# Altium PCB pcb.PcbDoc
Units mm, origin at the board's own origin, x right, y up, seen from the top; angles counter-clockwise.
Board outline 38.1 x 46.35 mm, 2 copper layers (Top Layer, Bottom Layer); 101 components, 100 nets, 200 pads, 0 vias.
Unrouted connection lines stored in the file: 62.
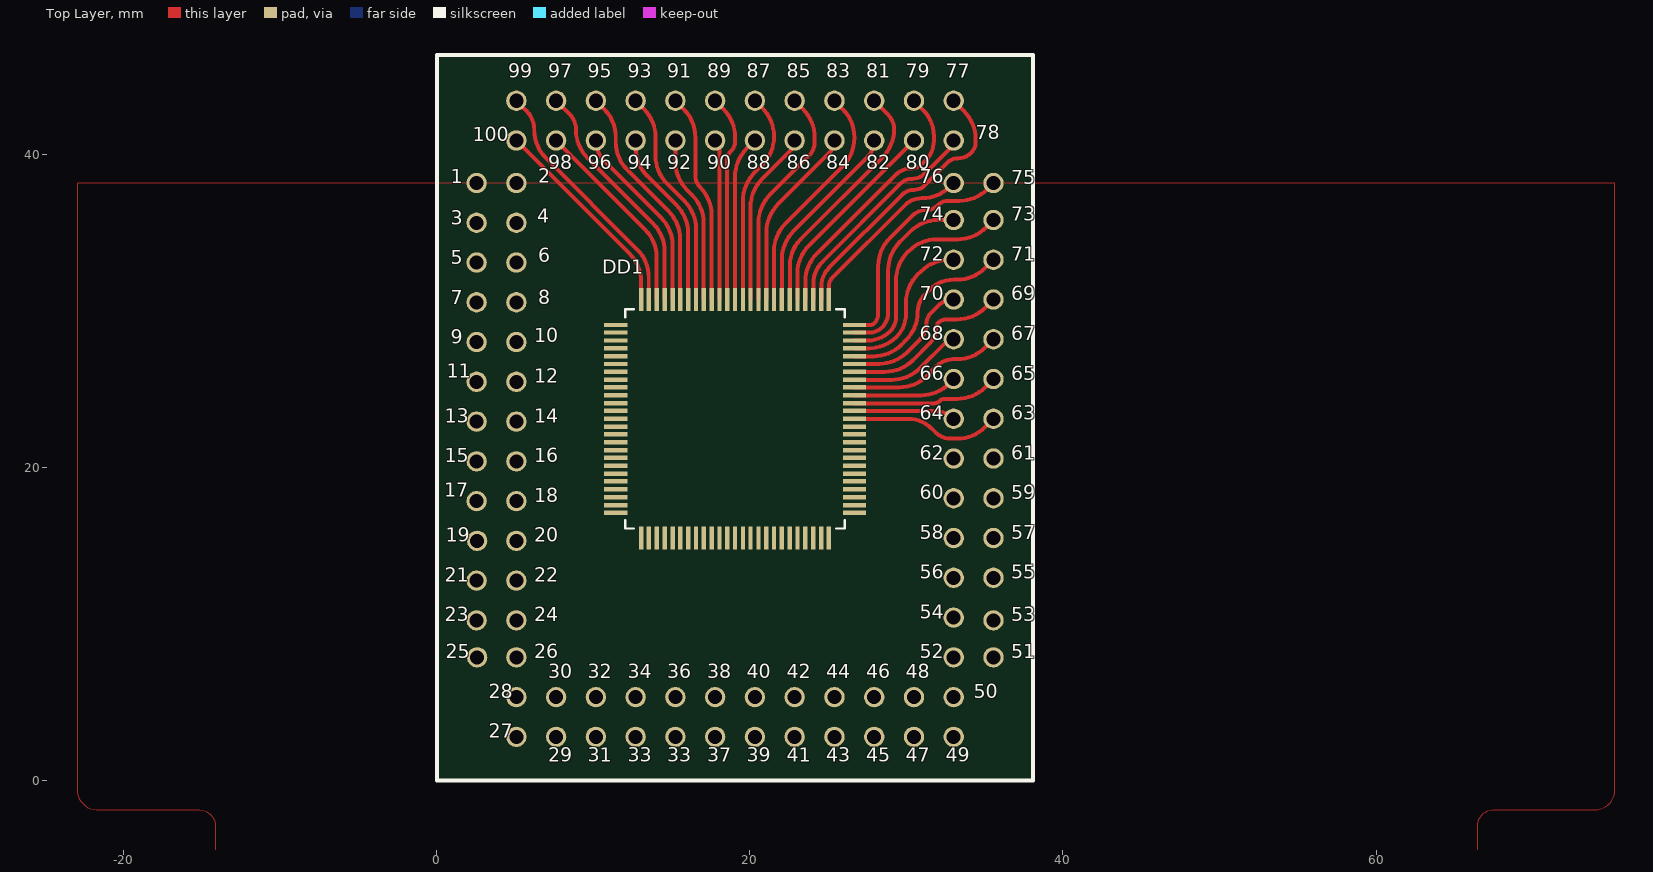
[diagram p0: Top Layer view]
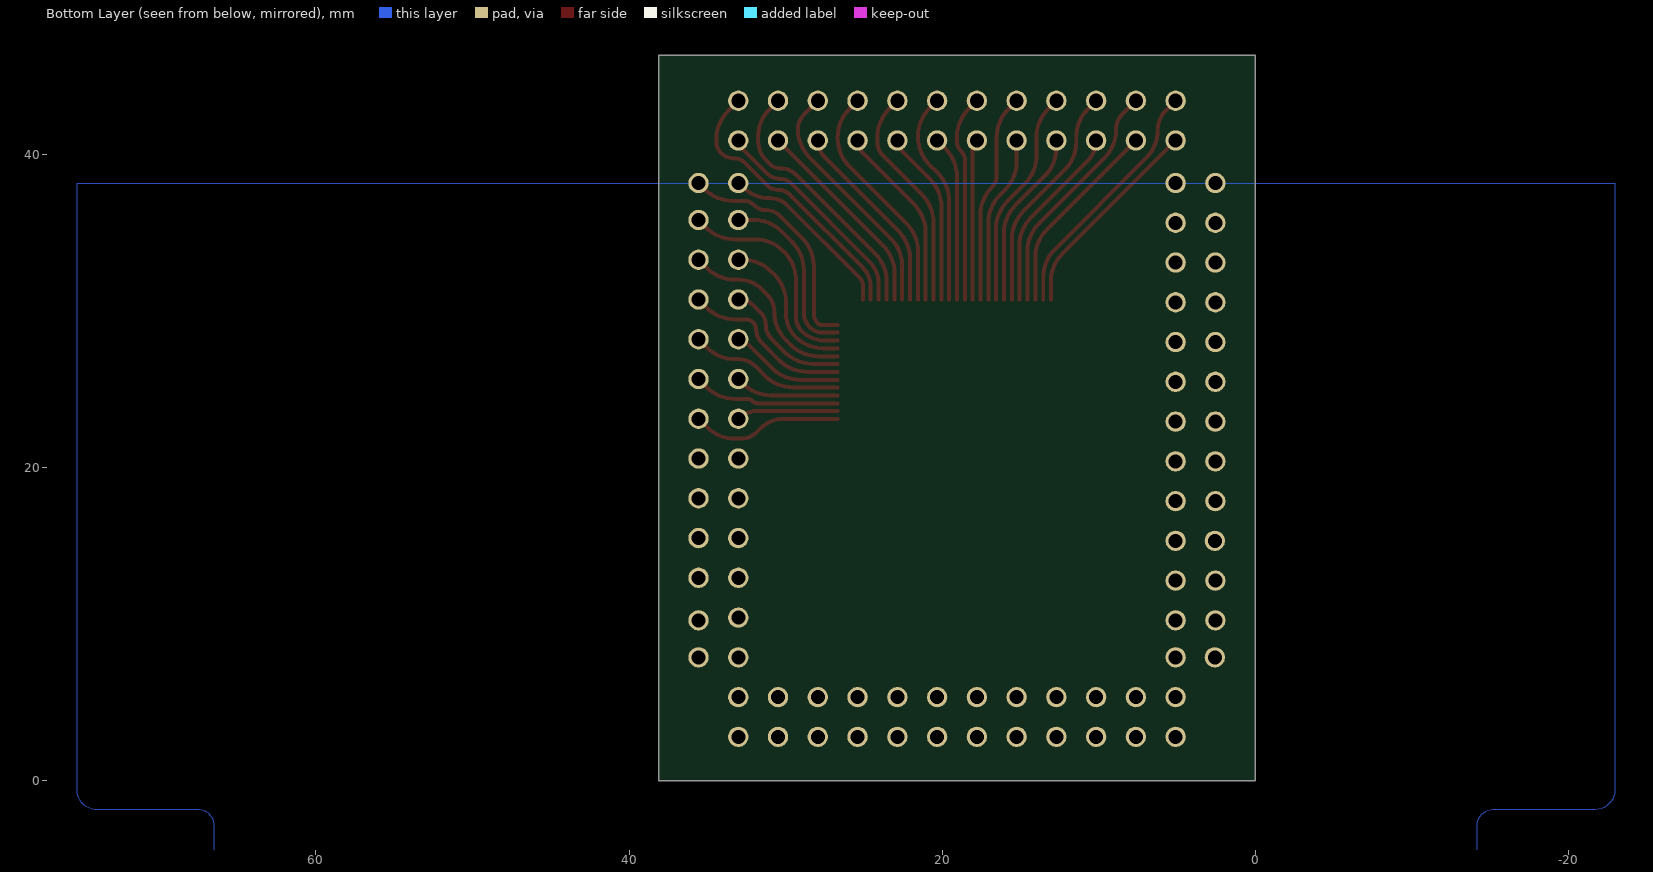
[diagram p1: Bottom Layer view, seen from below]

## Layer stack, top to bottom
Top Solder: solder mask 0.0102, Solder Resist, Dk 3.5
Top Layer: signal copper 0.0356
Dielectric 1: dielectric 0.32, FR-4, Dk 4.8
Bottom Layer: signal copper 0.0356
Bottom Solder: solder mask 0.0102, Solder Resist, Dk 3.5

## Board outline
0,0 38.1,0 38.1,46.355 0,46.355

## Design rules (kind name [scope] priority, off if disabled: settings)
Clearance [All] p1: gap=0.254 ignorepadtopadclearanceinfootprint=FALSE except(0: Arc-Hole Track-Hole SMDPad-Hole THPad-Hole Via-Hole Fill-Hole Poly-Hole Region-Hole Text-Hole; 0.2: Arc-Arc Arc-Track Arc-SMDPad Track-Track Track-SMDPad SMDPad-SMDPad THPad-THPad)
PolygonConnect [All] p1: connectstyle=Relief reliefconductorwidth=0.254 reliefentries=4 polygonreliefangle="90 Angle" airgapwidth=0.254
RoomDefinition main [InComponentClass('main')] p1: confinementstyle=ConfineIn formatcopy=TRUE lockcomponents=FALSE outline -1.651,-1.27 39.497,-1.27 39.497,47.879 -1.651,47.879
RoutingVias [All] p1: holewidth=0.2 width=0.4 viastyle="Through Hole" minholewidth=0.2 minwidth=0.4 maxholewidth=0.2 maxwidth=0.4
SolderMaskExpansion [All] p1: expansion=0.102
Width [All] p1: maxlimit=0.6 minlimit=0.2 preferedwidth=0.254 minimp=50.000000 maximp=50.000000 favimp=50.000000
30 further rules are at their usual default settings.

## Components (designator, comment, footprint, x,y, rotation, side; value= is the part's Value field where it differs from the comment)
1 "onepin" onepin 2.54,38.176 r0 top
2 "onepin" onepin 5.08,38.176 r0 top
3 "onepin" onepin 2.54,35.636 r0 top
4 "onepin" onepin 5.08,35.636 r0 top
5 "onepin" onepin 2.54,33.096 r0 top
6 "onepin" onepin 5.08,33.096 r0 top
7 "onepin" onepin 2.54,30.556 r0 top
8 "onepin" onepin 5.08,30.556 r0 top
9 "onepin" onepin 2.54,28.016 r0 top
10 "onepin" onepin 5.08,28.016 r0 top
11 "onepin" onepin 2.54,25.476 r0 top
12 "onepin" onepin 5.08,25.476 r0 top
13 "onepin" onepin 2.54,22.936 r0 top
14 "onepin" onepin 5.08,22.936 r0 top
15 "onepin" onepin 2.54,20.396 r0 top
16 "onepin" onepin 5.08,20.396 r0 top
17 "onepin" onepin 2.54,17.856 r0 top
18 "onepin" onepin 5.08,17.856 r0 top
19 "onepin" onepin 2.575,15.316 r0 top
20 "onepin" onepin 5.08,15.316 r0 top
21 "onepin" onepin 2.54,12.776 r0 top
22 "onepin" onepin 5.08,12.776 r0 top
23 "onepin" onepin 2.54,10.236 r0 top
24 "onepin" onepin 5.08,10.236 r0 top
25 "onepin" onepin 2.575,7.874 r0 top
26 "onepin" onepin 5.08,7.874 r0 top
27 "onepin" onepin 5.08,2.794 r0 top
28 "onepin" onepin 5.08,5.334 r0 top
29 "onepin" onepin 7.62,2.794 r0 top
30 "onepin" onepin 7.62,5.334 r0 top
31 "onepin" onepin 10.16,2.794 r0 top
32 "onepin" onepin 10.16,5.334 r0 top
33 "onepin" onepin 12.7,2.794 r0 top
33 "onepin" onepin 15.24,2.794 r0 top
34 "onepin" onepin 12.7,5.334 r0 top
36 "onepin" onepin 15.24,5.334 r0 top
37 "onepin" onepin 17.78,2.794 r0 top
38 "onepin" onepin 17.78,5.334 r0 top
39 "onepin" onepin 20.32,2.794 r0 top
40 "onepin" onepin 20.32,5.334 r0 top
41 "onepin" onepin 22.86,2.794 r0 top
42 "onepin" onepin 22.86,5.334 r0 top
43 "onepin" onepin 25.4,2.794 r0 top
44 "onepin" onepin 25.4,5.334 r0 top
45 "onepin" onepin 27.94,2.794 r0 top
46 "onepin" onepin 27.94,5.334 r0 top
47 "onepin" onepin 30.48,2.794 r0 top
48 "onepin" onepin 30.48,5.334 r0 top
49 "onepin" onepin 33.02,2.794 r0 top
50 "onepin" onepin 33.02,5.334 r0 top
51 "onepin" onepin 35.56,7.874 r0 top
52 "onepin" onepin 33.02,7.874 r0 top
53 "onepin" onepin 35.56,10.236 r0 top
54 "onepin" onepin 33.02,10.414 r0 top
55 "onepin" onepin 35.56,12.954 r0 top
56 "onepin" onepin 33.02,12.954 r0 top
57 "onepin" onepin 35.56,15.494 r0 top
58 "onepin" onepin 33.02,15.494 r0 top
59 "onepin" onepin 35.56,18.034 r0 top
60 "onepin" onepin 33.02,18.034 r0 top
61 "onepin" onepin 35.56,20.574 r0 top
62 "onepin" onepin 33.02,20.574 r0 top
63 "onepin" onepin 35.56,23.114 r0 top
64 "onepin" onepin 33.02,23.114 r0 top
65 "onepin" onepin 35.56,25.654 r0 top
66 "onepin" onepin 33.02,25.654 r0 top
67 "onepin" onepin 35.56,28.194 r0 top
68 "onepin" onepin 33.02,28.194 r0 top
69 "onepin" onepin 35.56,30.734 r0 top
70 "onepin" onepin 33.02,30.734 r0 top
71 "onepin" onepin 35.56,33.274 r0 top
72 "onepin" onepin 33.02,33.274 r0 top
73 "onepin" onepin 35.56,35.814 r0 top
74 "onepin" onepin 33.02,35.814 r0 top
75 "onepin" onepin 35.56,38.176 r0 top
76 "onepin" onepin 33.02,38.176 r0 top
77 "onepin" onepin 33.02,43.434 r0 top
78 "onepin" onepin 33.02,40.894 r0 top
79 "onepin" onepin 30.48,43.434 r0 top
80 "onepin" onepin 30.48,40.894 r0 top
81 "onepin" onepin 27.94,43.434 r0 top
82 "onepin" onepin 27.94,40.894 r0 top
83 "onepin" onepin 25.4,43.434 r0 top
84 "onepin" onepin 25.4,40.894 r0 top
85 "onepin" onepin 22.86,43.434 r0 top
86 "onepin" onepin 22.86,40.894 r0 top
87 "onepin" onepin 20.32,43.434 r0 top
88 "onepin" onepin 20.32,40.894 r0 top
89 "onepin" onepin 17.78,43.434 r0 top
90 "onepin" onepin 17.78,40.894 r0 top
91 "onepin" onepin 15.24,43.434 r0 top
92 "onepin" onepin 15.24,40.894 r0 top
93 "onepin" onepin 12.7,43.434 r0 top
94 "onepin" onepin 12.7,40.894 r0 top
95 "onepin" onepin 10.16,43.434 r0 top
96 "onepin" onepin 10.16,40.894 r0 top
97 "onepin" onepin 7.62,43.434 r0 top
98 "onepin" onepin 7.62,40.894 r0 top
99 "onepin" onepin 5.08,43.434 r0 top
100 "onepin" onepin 5.08,40.894 r0 top
DD1 "EPM3128ATC100-10N" QFP50P1600X1600X120-100N 19.05,23.114 r0 top

## Footprints (in the part's own frame and the unit in brackets; to place one, negate y for a bottom-side part, rotate by r counter-clockwise, add the part's x,y. Pads: shape width x height; smd on the part's side, far side on the other; paste and mask are expansions set on the pad)
onepin [mm]
  round 1.3 hole 0.9: 1(0,0)
QFP50P1600X1600X120-100N [mil]
  rect 58x11 smd: 1(-300,236) 2(-300,217) 3(-300,197) 4(-300,177) 5(-300,157) 6(-300,138) 7(-300,118) 8(-300,98) 9(-300,79) 10(-300,59) 11(-300,39) 12(-300,20) 13(-300,0) 14(-300,-20) 15(-300,-39) 16(-300,-59) 17(-300,-79) 18(-300,-98) 19(-300,-118) 20(-300,-138) 21(-300,-157) 22(-300,-177) 23(-300,-197) 24(-300,-217) 25(-300,-236) 51(300,-236) 52(300,-217) 53(300,-197) 54(300,-177) 55(300,-157) 56(300,-138) 57(300,-118) 58(300,-98) 59(300,-79) 60(300,-59) 61(300,-39) 62(300,-20) 63(300,0) 64(300,20) 65(300,39) 66(300,59) 67(300,79) 68(300,98) 69(300,118) 70(300,138) 71(300,157) 72(300,177) 73(300,197) 74(300,217) 75(300,236)
  rect 11x58 smd: 26(-236,-300) 27(-217,-300) 28(-197,-300) 29(-177,-300) 30(-157,-300) 31(-138,-300) 32(-118,-300) 33(-98,-300) 34(-79,-300) 35(-59,-300) 36(-39,-300) 37(-20,-300) 38(0,-300) 39(20,-300) 40(39,-300) 41(59,-300) 42(79,-300) 43(98,-300) 44(118,-300) 45(138,-300) 46(157,-300) 47(177,-300) 48(197,-300) 49(217,-300) 50(236,-300) 76(236,300) 77(217,300) 78(197,300) 79(177,300) 80(157,300) 81(138,300) 82(118,300) 83(98,300) 84(79,300) 85(59,300) 86(39,300) 87(20,300) 88(0,300) 89(-20,300) 90(-39,300) 91(-59,300) 92(-79,300) 93(-98,300) 94(-118,300) 95(-138,300) 96(-157,300) 97(-177,300) 98(-197,300) 99(-217,300) 100(-236,300)
  silkscreen extent -276,-276 276,276, body extent -315,-315 315,315, height 50

## Part data
DD1: "100-Pin QFP", Package=None, Availability=Unavailable, MP=EPM3128ATC100-10N, Price=None

## Nets (pads, with @x,y where several pads share a name; then routed paths per layer and width w, separated by ;. In a path a pad name is that pad's centre, name@x,y a point inside that pad or via, vN(x,y) a via of type N, cw(c..) or ccw(c..) an arc to the next point about the centre after c; other vN are vias at no path point)
Net1_1: 1.1 DD1.1
Net2_1: 2.1 DD1.2
Net3_1: 3.1 DD1.3
Net4_1: 4.1 DD1.4
Net5_1: 5.1 DD1.5
Net6_1: 6.1 DD1.6
Net7_1: 7.1 DD1.7
Net8_1: 8.1 DD1.8
Net9_1: 9.1 DD1.9
Net10_1: 10.1 DD1.10
Net11_1: 11.1 DD1.11
Net12_1: 12.1 DD1.12
Net13_1: 13.1 DD1.13
Net14_1: 14.1 DD1.14
Net15_1: 15.1 DD1.15
Net16_1: 16.1 DD1.16
Net17_1: 17.1 DD1.17
Net18_1: 18.1 DD1.18
Net19_1: 19.1 DD1.19
Net20_1: 20.1 DD1.20
Net21_1: 21.1 DD1.21
Net22_1: 22.1 DD1.22
Net23_1: 23.1 DD1.23
Net24_1: 24.1 DD1.24
Net25_1: 25.1 DD1.25
Net26_1: 26.1 DD1.26
Net27_1: 27.1 DD1.27
Net28_1: 28.1 DD1.28
Net29_1: 29.1 DD1.29
Net30_1: 30.1 DD1.30
Net31_1: 31.1 DD1.31
Net32_1: 32.1 DD1.32
Net33_1: 33.1@15.24,2.794 DD1.35
Net33_1: 33.1@12.7,2.794 DD1.33
Net34_1: 34.1 DD1.34
Net36_1: 36.1 DD1.36
Net37_1: 37.1 DD1.37
Net38_1: 38.1 DD1.38
Net39_1: 39.1 DD1.39
Net40_1: 40.1 DD1.40
Net41_1: 41.1 DD1.41
Net42_1: 42.1 DD1.42
Net43_1: 43.1 DD1.43
Net44_1: 44.1 DD1.44
Net45_1: 45.1 DD1.45
Net46_1: 46.1 DD1.46
Net47_1: 47.1 DD1.47
Net48_1: 48.1 DD1.48
Net49_1: 49.1 DD1.49
Net50_1: 50.1 DD1.50
Net51_1: 51.1 DD1.51
Net52_1: 52.1 DD1.52
Net53_1: 53.1 DD1.53
Net54_1: 54.1 DD1.54
Net55_1: 55.1 DD1.55
Net56_1: 56.1 DD1.56
Net57_1: 57.1 DD1.57
Net58_1: 58.1 DD1.58
Net59_1: 59.1 DD1.59
Net60_1: 60.1 DD1.60
Net61_1: 61.1 DD1.61
Net62_1: 62.1 DD1.62 | length 0.1
  Top Layer w0.254: 62.1 62.1@33.02,20.676
Net63_1: 63.1 DD1.63 | length 9.7
  Top Layer w0.254: DD1.63 30.09,23.114 cw(c30.09,20.946) 31.623,22.479 31.846,22.256 ccw(c32.84,23.25) 32.84,21.844 33.238,21.844 ccw(c33.238,24.384) 35.034,22.588 63.1
Net64_1: 64.1 DD1.64 | length 6.5
  Top Layer w0.254: DD1.64 31.794,23.622 cw(c31.794,21.888) 64.1
Net65_1: 65.1 DD1.65 | length 9.4
  Top Layer w0.254: DD1.65 31.763,24.105 ccw(c31.763,24.625) 32.131,24.257 cw(c32.438,23.95) 32.438,24.384 33.238,24.384 ccw(c33.238,26.924) 35.034,25.128 65.1
Net66_1: 66.1 DD1.66 | length 6.7
  Top Layer w0.254: DD1.66 30.926,24.613 ccw(c30.926,27.153) 32.723,25.357 66.1
Net67_1: 67.1 DD1.67 | length 9.9
  Top Layer w0.254: DD1.67 29.529,25.121 ccw(c29.529,27.661) 31.326,25.865 31.936,26.475 cw(c33.02,25.391) 33.02,26.924 33.238,26.924 ccw(c33.238,29.464) 35.034,27.668 67.1
Net68_1: 68.1 DD1.68 | length 7.3
  Top Layer w0.254: DD1.68 29.065,25.603 ccw(c29.065,28.143) 30.861,26.347 68.1@32.487,27.973 ; 68.1@32.487,27.973 cw(c33.02,27.44) 68.1
Net69_1: 69.1 DD1.69 | length 10.9
  Top Layer w0.254: DD1.69 28.615,26.111 ccw(c28.615,28.651) 30.411,26.855 31.518,27.962 ccw(c30.651,28.829) 31.877,28.829 cw(c32.49,28.829) 32.057,29.263 cw(c32.543,28.776) 32.543,29.464 33.238,29.464 ccw(c33.238,32.004) 35.034,30.208 69.1
Net70_1: 70.1 DD1.70 | length 8.7
  Top Layer w0.254: DD1.70 28.234,26.619 ccw(c28.234,29.159) 30.03,27.363 30.92,28.253 ccw(c30.09,29.083) 31.264,29.083 cw(c32.49,29.083) 31.623,29.95 31.973,30.3 cw(c33.02,29.254) 70.1 70.1@32.722,30.734
Net71_1: 71.1 DD1.71 | length 12
  Top Layer w0.254: DD1.71 27.886,27.102 ccw(c27.886,29.642) 29.682,27.846 29.972,28.136 ccw(c28.176,29.932) 30.716,29.932 cw(c32.302,29.932) 31.181,31.054 31.496,31.369 cw(c33.029,29.836) 33.029,32.004 33.238,32.004 ccw(c33.238,34.544) 35.034,32.748 71.1
Net72_1: 72.1 DD1.72 | length 9.8
  Top Layer w0.254: DD1.72 27.574,27.61 ccw(c27.574,30.15) 29.37,28.354 ccw(c27.916,29.808) 29.972,29.808 29.972,30.525 cw(c32.512,30.525) 30.716,32.321 30.925,32.53 cw(c32.721,30.734) 32.721,33.274 72.1
Net73_1: 73.1 DD1.73 | length 13.9
  Top Layer w0.254: DD1.73 27.546,28.118 ccw(c27.546,30.112) 28.956,28.702 ccw(c28.036,29.622) 29.337,29.622 29.337,31.968 cw(c31.877,31.968) 30.081,33.764 30.157,33.84 cw(c31.953,32.044) 31.953,34.584 33.278,34.584 ccw(c33.278,37.124) 35.074,35.328 73.1
Net74_1: 74.1 DD1.74 | length 11.5
  Top Layer w0.254: DD1.74 27.651,28.626 ccw(c27.651,29.753) 28.448,28.956 ccw(c27.528,29.876) 28.829,29.876 28.829,32.603 cw(c31.369,32.603) 29.573,34.399 30.244,35.07 cw(c32.04,33.274) 32.04,35.814 74.1
Net75_1: 75.1 DD1.75 | length 14.8
  Top Layer w0.254: DD1.75 27.695,29.108 ccw(c27.695,29.455) 27.94,29.21 ccw(c27.327,29.823) 28.194,29.823 28.194,32.857 cw(c30.734,32.857) 28.938,34.653 30.359,36.074 cw(c31.264,35.17) 31.264,36.449 ccw(c31.264,37.465) 31.982,36.746 cw(c32.674,36.054) 32.674,37.033 33.365,37.033 ccw(c33.365,39.573) 35.161,37.777 75.1
Net76_1: 76.1 DD1.76 | length 11.5
  Top Layer w0.254: DD1.76 25.044,31.579 cw(c25.825,31.579) 25.273,32.131 29.894,36.752 cw(c31.003,35.642) 31.003,37.211 ccw(c31.003,39.751) 32.799,37.955 76.1
Net77_1: 77.1 DD1.77 | length 18
  Top Layer w0.254: DD1.77 24.562,31.548 cw(c26.284,31.548) 25.066,32.766 29.724,37.424 cw(c30.48,36.668) 30.48,37.737 ccw(c30.48,38.7) 31.161,38.019 32.624,39.482 cw(c33.274,38.831) 33.274,39.751 ccw(c33.274,40.977) 34.141,40.11 ccw(c33.475,40.776) 34.417,40.776 34.417,40.985 ccw(c31.877,40.985) 33.673,42.781 77.1
Net78_1: 78.1 DD1.78 | length 14.2
  Top Layer w0.254: DD1.78 24.054,31.737 cw(c26.048,31.737) 24.638,33.147 29.629,38.138 cw(c30.353,37.413) 30.353,38.438 ccw(c30.353,39.559) 31.146,38.766 32.84,40.46 ccw(c32.407,40.894) 78.1
Net79_1: 79.1 DD1.79 | length 16.8
  Top Layer w0.254: DD1.79 23.546,31.892 cw(c26.086,31.892) 24.29,33.688 29.269,38.667 cw(c30.353,37.583) 30.353,39.116 ccw(c30.353,40.036) 31.003,39.385 31.227,39.609 ccw(c29.966,40.871) 31.75,40.871 31.75,41.184 ccw(c29.384,41.184) 31.058,42.856 79.1
Net80_1: 80.1 DD1.80 | length 13.1
  Top Layer w0.254: DD1.80 23.038,32.4 cw(c25.578,32.4) 23.782,34.196 80.1
Net81_1: 81.1 DD1.81 | length 15.7
  Top Layer w0.254: DD1.81 22.555,32.928 cw(c24.897,32.928) 23.241,34.584 28.466,39.809 ccw(c26.67,41.605) 29.21,41.605 ccw(c27.861,41.605) 28.815,42.559 81.1
Net82_1: 82.1 DD1.82 | length 12.4
  Top Layer w0.254: DD1.82 22.047,33.314 cw(c24.587,33.314) 22.791,35.11 27.491,39.81 ccw(c26.407,40.894) 82.1
Net83_1: 83.1 DD1.83 | length 15
  Top Layer w0.254: DD1.83 21.539,33.804 cw(c24.079,33.804) 22.283,35.6 25.926,39.243 ccw(c24.13,41.039) 26.67,41.039 26.67,41.112 ccw(c24.13,41.112) 25.926,42.908 83.1
Net84_1: 84.1 DD1.84 | length 11.8
  Top Layer w0.254: DD1.84 21.057,35.027 cw(c23.597,35.027) 21.801,36.823 25.066,40.088 ccw(c24.261,40.894) 84.1
Net85_1: 85.1 DD1.85 | length 14.4
  Top Layer w0.254: DD1.85 20.549,35.644 cw(c23.089,35.644) 21.293,37.44 23.784,39.931 ccw(c22.947,40.767) 24.13,40.767 24.13,41.112 ccw(c21.59,41.112) 23.386,42.908 85.1
Net86_1: 86.1 DD1.86 | length 11.2
  Top Layer w0.254: DD1.86 20.041,36.641 cw(c22.581,36.641) 20.785,38.438 22.591,40.244 ccw(c21.94,40.894) 86.1
Net87_1: 87.1 DD1.87 | length 13.7
  Top Layer w0.254: DD1.87 19.558,37.048 cw(c22.098,37.048) 20.302,38.844 20.795,39.337 ccw(c18.999,41.133) 21.539,41.133 21.539,41.163 ccw(c18.999,41.163) 20.795,42.959 87.1
Net88_1: 88.1 DD1.88 | length 10.6
  Top Layer w0.254: DD1.88 19.05,38.572 cw(c21.59,38.572) 19.794,40.368 88.1
Net89_1: 89.1 DD1.89 | length 13.3
  Top Layer w0.254: 89.1 18.306,42.908 cw(c16.51,41.112) 19.05,41.112 19.05,40.833 cw(c18.183,40.833) 18.796,40.219 ccw(c19.409,39.606) 18.542,39.606 DD1.89
Net90_1: 90.1 DD1.90 | length 10.2
  Top Layer w0.254: 90.1 cw(c17.105,40.219) 18.059,40.219 DD1.90
Net91_1: 91.1 DD1.91 | length 13.4
  Top Layer w0.254: 91.1 15.766,42.908 cw(c13.97,41.112) 16.51,41.112 16.51,38.648 ccw(c17.526,38.648) 16.807,37.93 cw(c15.011,36.133) 17.551,36.133 DD1.91
Net92_1: 92.1 DD1.92 | length 10.7
  Top Layer w0.254: 92.1 15.24,39.533 ccw(c17.78,39.533) 15.984,37.737 16.299,37.422 cw(c14.503,35.625) 17.043,35.625 DD1.92
Net93_1: 93.1 DD1.93 | length 14
  Top Layer w0.254: 93.1 13.226,42.908 cw(c11.43,41.112) 13.97,41.112 13.97,39.932 ccw(c16.51,39.932) 14.714,38.136 15.817,37.033 cw(c14.021,35.237) 16.561,35.237 DD1.93
Net94_1: 94.1 DD1.94 | length 11.3
  Top Layer w0.254: 94.1 12.7,40.422 ccw(c15.24,40.422) 13.444,38.626 15.309,36.761 cw(c13.513,34.965) 16.053,34.965 DD1.94
Net95_1: 95.1 DD1.95 | length 14.6
  Top Layer w0.254: 95.1 10.686,42.908 cw(c8.89,41.112) 11.43,41.112 11.43,40.803 ccw(c13.97,40.803) 12.174,39.007 14.801,36.38 cw(c13.005,34.584) 15.545,34.584 DD1.95
Net96_1: 96.1 DD1.96 | length 12
  Top Layer w0.254: 96.1 ccw(c12,40.894) 10.699,39.593 14.318,35.974 cw(c12.522,34.178) 15.062,34.178 DD1.96
Net97_1: 97.1 DD1.97 | length 15.3
  Top Layer w0.254: 97.1 8.467,42.587 cw(c7.444,41.565) 8.89,41.565 ccw(c11.43,41.565) 9.634,39.769 13.81,35.593 cw(c12.014,33.797) 14.554,33.797 DD1.97
Net98_1: 98.1 DD1.98 | length 12.7
  Top Layer w0.254: 98.1 13.302,35.212 cw(c11.506,33.416) 14.046,33.416 DD1.98
Net99_1: 99.1 DD1.99 | length 15.9
  Top Layer w0.254: 99.1 5.71,42.804 cw(c4.471,41.565) 6.223,41.565 ccw(c8.763,41.565) 6.967,39.769 12.794,33.942 cw(c10.998,32.146) 13.538,32.146 DD1.99
Net100_1: 100.1 DD1.100 | length 13.4
  Top Layer w0.254: 100.1 12.312,33.662 cw(c10.516,31.866) 13.056,31.866 DD1.100

## Polygon pours and split planes (outlines as drawn)
no net on Bottom Layer "NONET_L02_P003" (solid, remove dead copper, shelved, pour order 3): -15.231,-1.862 ccw(c-15.179,-1.746) -15.179,-1.873 cw(c-15.179,-2.903) -14.149,-2.903 ccw(c-14.021,-2.903) -14.147,-2.921 -14.147,-11.062 ccw(c-14.02,-11.062) -14.142,-11.1 ccw(c-14.021,-11.138) -14.147,-11.138 ccw(c-13.414,-11.138) -13.414,-11.872 ccw(c-13.414,-11.745) -13.375,-11.866 65.786,-11.866 ccw(c65.786,-11.739) 65.835,-11.856 ccw(c65.748,-11.128) 66.481,-11.163 ccw(c66.371,-11.1) 66.498,-11.1 66.498,-2.794 cw(c67.526,-2.893) 67.449,-1.862 73.983,-1.862 ccw(c73.983,-0.577) 75.267,-0.577 75.267,38.176 -22.987,38.176 -22.987,-0.596 ccw(c-22.87,-0.597) -22.985,-0.622 ccw(c-21.701,-0.577) -21.731,-1.862
no net on Top Layer "NONET_L01_P004" (solid, remove dead copper, shelved, pour order 4): -15.231,-1.862 ccw(c-15.179,-1.746) -15.179,-1.873 cw(c-15.179,-2.903) -14.149,-2.903 ccw(c-14.021,-2.903) -14.147,-2.921 -14.147,-11.062 ccw(c-14.02,-11.062) -14.142,-11.1 ccw(c-14.02,-11.138) -14.147,-11.138 ccw(c-13.414,-11.138) -13.414,-11.872 ccw(c-13.414,-11.745) -13.375,-11.866 65.786,-11.866 ccw(c65.786,-11.739) 65.835,-11.856 ccw(c65.748,-11.128) 66.481,-11.163 ccw(c66.371,-11.1) 66.498,-11.1 66.498,-2.794 cw(c67.526,-2.893) 67.449,-1.862 73.983,-1.862 ccw(c73.983,-0.577) 75.267,-0.577 75.267,38.176 -22.987,38.176 -22.987,-0.596 ccw(c-22.869,-0.597) -22.985,-0.622 ccw(c-21.701,-0.577) -21.731,-1.862

## Silkscreen, mask and mechanical layers (free items; w line width, h text height)
Top Overlay:
  the board outline again, w0.254